# Altium PCB Voltage transducers.PcbDoc
Units mm, origin at the board's own origin, x right, y up, seen from the top; angles counter-clockwise.
Board outline 170 x 100 mm, 2 copper layers (Top Layer, Bottom Layer); 65 components, 30 nets, 157 pads, 0 vias.
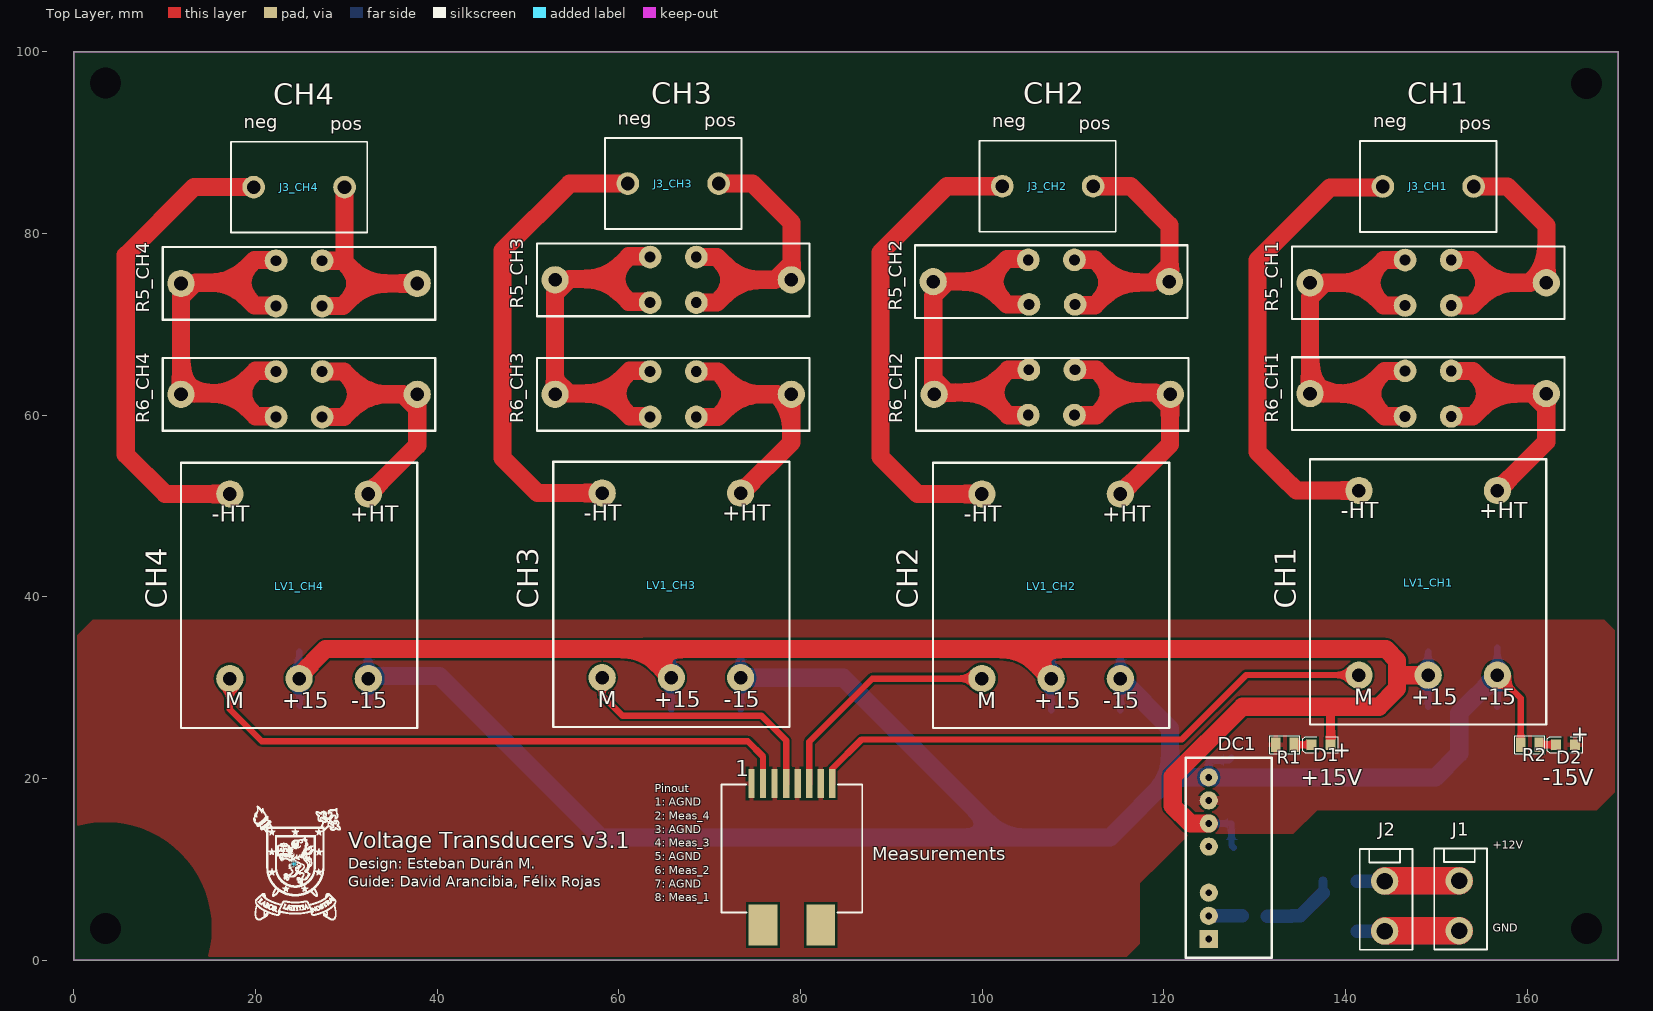
[diagram p0: Top Layer view]
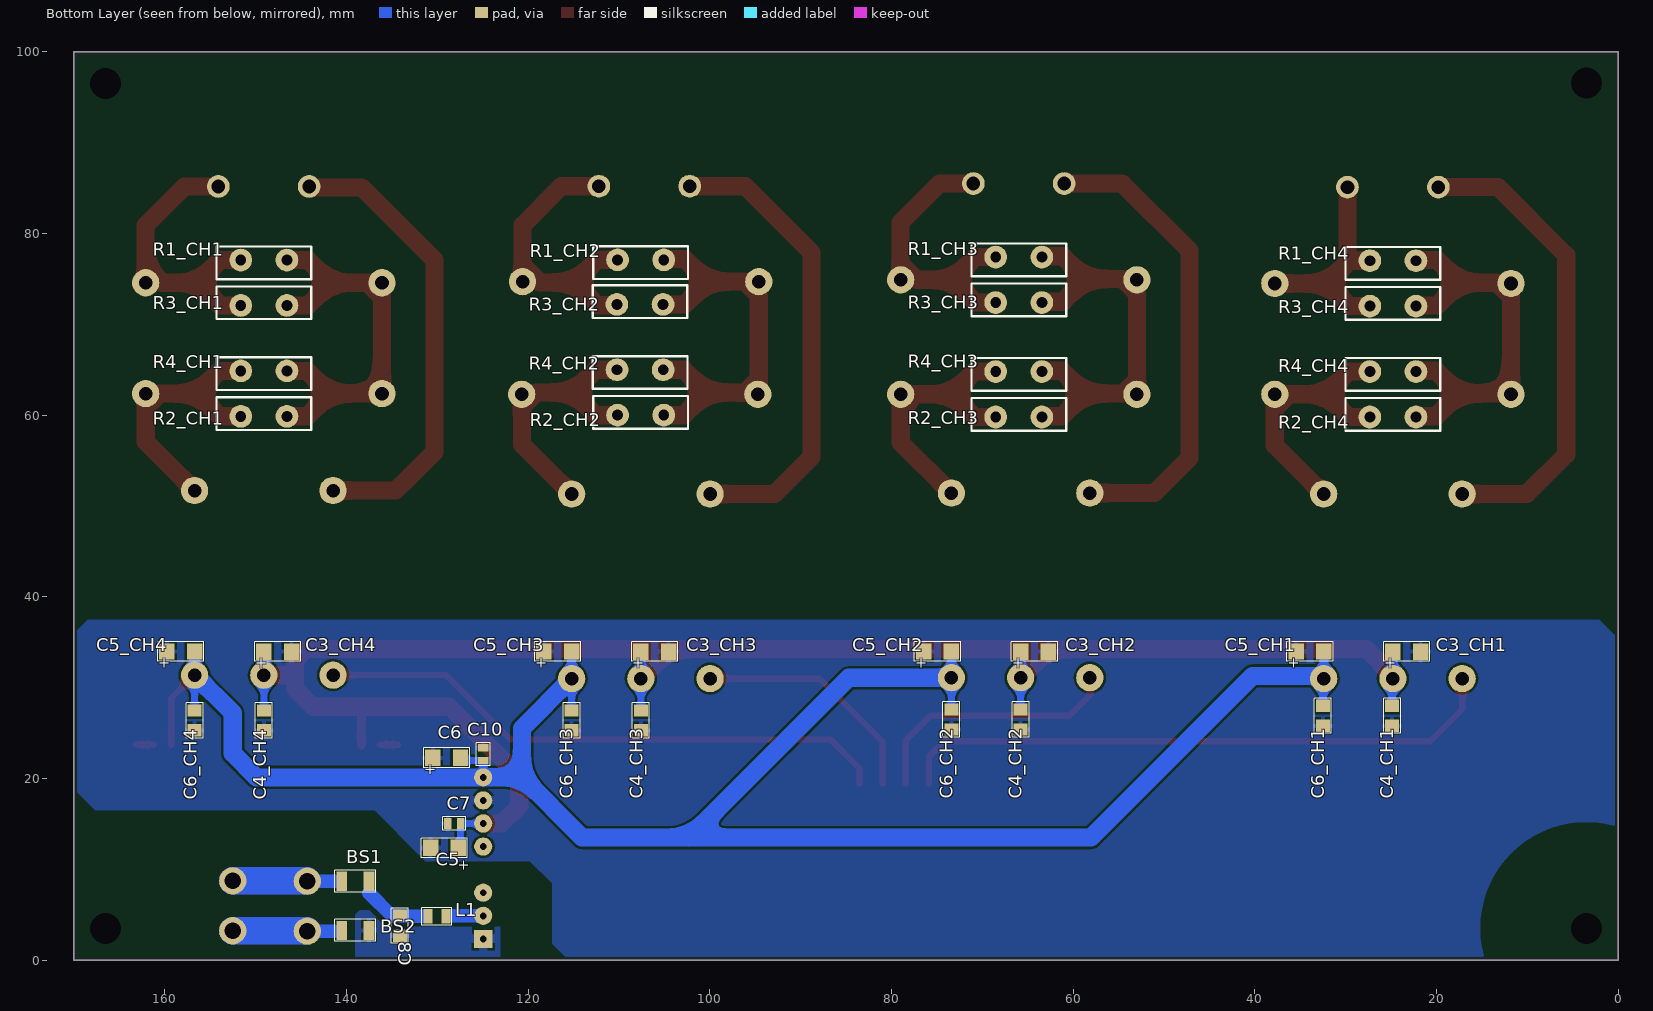
[diagram p1: Bottom Layer view, seen from below]
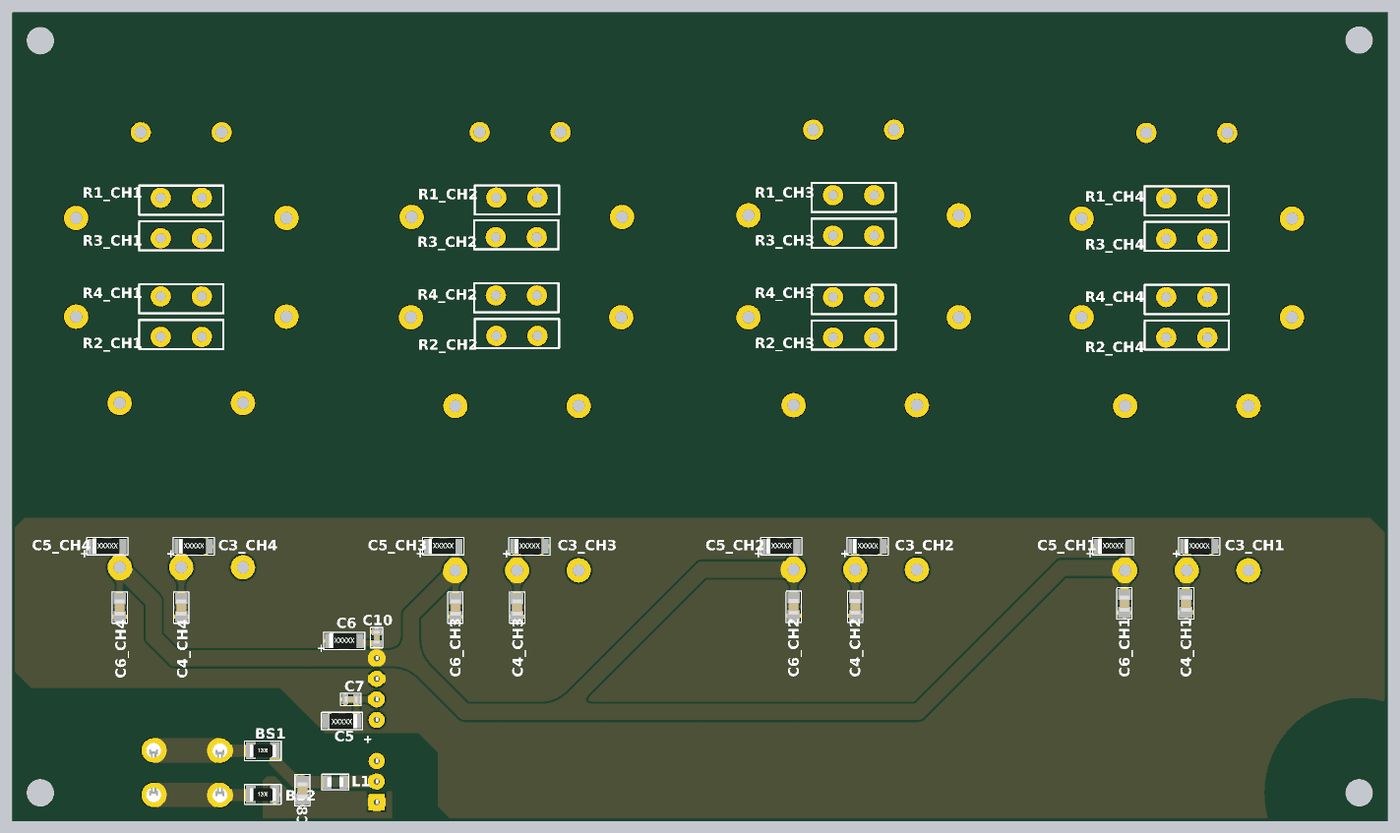
[diagram p2: 3D render of the assembled board from below, using the file's embedded part models]

## Layer stack, top to bottom
Top Solder: solder mask 0.0102, Solder Resist, Dk 3.5
Top Layer: signal copper 0.0356
Dielectric1: dielectric 0.32, FR-4, Dk 4.8
Bottom Layer: signal copper 0.0356
Bottom Solder: solder mask 0.0102, Solder Resist, Dk 3.5

## Board outline
0,0 0,100 170,100 170,0

## Design rules (kind name [scope] priority, off if disabled: settings)
Clearance 1.5kV [InNamedPolygon('GND_filtered') OR InNamedPolygon('AGND') vs InNamedUnion('Mechanical_Pads')] p1: gap=0.254 except(10: THPad-Poly)
Clearance [All] p2: gap=0.254
ComponentClearance [All] p1: gap=0.254 collisioncheckmode=3 verticalgap=0 showdistances=FALSE
Height [All] p1: minheight=0 maxheight=50 prefheight=12.7
HoleSize [All] p1: absolutevalues=TRUE maxlimit=100 minlimit=0.025 maxpercent=80.000 minpercent=20.000
MinimumSolderMaskSliver [All] p1: minsoldermaskwidth=0.154
PlaneConnect [All] p1: planeconnectstyle=Relief reliefexpansion=0.508 reliefentries=4 reliefconductorwidth=0.254 reliefairgap=0.7
PolygonConnect PolygonConnect_1 [All vs HasFootprint('DC/DC +-15V 6W')] p1: connectstyle=Relief reliefconductorwidth=1 reliefentries=4 polygonreliefangle="90 Angle" airgapwidth=0.254
PolygonConnect [All] p2: connectstyle=Relief reliefconductorwidth=0.5 reliefentries=4 polygonreliefangle="90 Angle" airgapwidth=0.254
RoutingVias [All] p1: holewidth=0.711 width=1.27 viastyle="Through Hole" minholewidth=0.711 minwidth=1.27 maxholewidth=0.711 maxwidth=1.27
SilkToSilkClearance [All] p1: silktosilkclearance=0
SilkToSolderMaskClearance SilkscreenOverComponentPads [IsPad] p1: minsilkscreentomaskgap=0 clearancetoexposedcopper=TRUE
SolderMaskExpansion [All] p1: expansion=0.102
Width [All] p1: maxlimit=3 minlimit=0.254 preferedwidth=1.5
23 further rules are at their usual default settings.

## Classes and differential pairs
component class Voltage_Board: * C5 C6 Measurements
channel class Transducer: CH1 CH2 CH3 CH4
net class MEDICION[1..4]: MEDICION1 MEDICION2 MEDICION3 MEDICION4
component class PowerSupply: BS1 BS2 C7 C8 C10 D1 D2 DC1 J1 J2 L1 R1 R2 R?
component class CH4: C3_CH4 C4_CH4 C5_CH4 C6_CH4 J3_CH4 LV1_CH4 R1_CH4 R2_CH4 R3_CH4 R4_CH4 R5_CH4 R6_CH4
component class CH3: C3_CH3 C4_CH3 C5_CH3 C6_CH3 J3_CH3 LV1_CH3 R1_CH3 R2_CH3 R3_CH3 R4_CH3 R5_CH3 R6_CH3
component class CH2: C3_CH2 C4_CH2 C5_CH2 C6_CH2 J3_CH2 LV1_CH2 R1_CH2 R2_CH2 R3_CH2 R4_CH2 R5_CH2 R6_CH2
component class CH1: C3_CH1 C4_CH1 C5_CH1 C6_CH1 J3_CH1 LV1_CH1 R1_CH1 R2_CH1 R3_CH1 R4_CH1 R5_CH1 R6_CH1

## Components (designator, comment, footprint, x,y, rotation, side; value= is the part's Value field where it differs from the comment)
* "LOGO USACH" "Logo Usach" 24.3,10.4 r0 top
BS1 "Ferrite bead" RES_1206 140.5,8.7 r270 bottom
BS2 "Ferrite bead" RES_1206 140.5,3.3 r270 bottom
C3_CH1 "1uF" "CAP_1206 Tantalio" 23.275,33.975 r90 bottom (schematic designator C3)
C3_CH2 "1uF" "CAP_1206 Tantalio" 64.255,33.975 r90 bottom (schematic designator C3)
C3_CH3 "1uF" "CAP_1206 Tantalio" 106.055,33.975 r90 bottom (schematic designator C3)
C3_CH4 "1uF" "CAP_1206 Tantalio" 147.555,33.975 r90 bottom (schematic designator C3)
C4_CH1 "100nF" CAP_0805 24.886,28.006 r180 bottom (schematic designator C4)
C4_CH2 "100nF" CAP_0805 65.78,27.606 r180 bottom (schematic designator C4)
C4_CH3 "100nF" CAP_0805 107.58,27.506 r180 bottom (schematic designator C4)
C4_CH4 "100nF" CAP_0805 149.08,27.506 r180 bottom (schematic designator C4)
C5 "10uF" "CAP_1206 Tantalio" 129.205,12.386 r270 bottom
C5_CH1 "1uF" "CAP_1206 Tantalio" 33.931,33.985 r90 bottom (schematic designator C5)
C5_CH2 "1uF" "CAP_1206 Tantalio" 74.925,33.985 r90 bottom (schematic designator C5)
C5_CH3 "1uF" "CAP_1206 Tantalio" 116.725,33.985 r90 bottom (schematic designator C5)
C5_CH4 "1uF" "CAP_1206 Tantalio" 158.225,33.985 r90 bottom (schematic designator C5)
C6 "10uF" "CAP_1206 Tantalio" 128.955,22.286 r90 bottom
C6_CH1 "100nF" CAP_0805 32.506,25.806 r0 bottom (schematic designator C6)
C6_CH2 "100nF" CAP_0805 73.4,25.406 r0 bottom (schematic designator C6)
C6_CH3 "100nF" CAP_0805 115.2,25.306 r0 bottom (schematic designator C6)
C6_CH4 "100nF" CAP_0805 156.7,25.306 r0 bottom (schematic designator C6)
C7 "0.33uF" CAP_0603 127.43,15.056 r270 bottom
C8 "10uF" CAP_0805 134.1,4.9 r180 bottom
C10 "0.33uF" CAP_0603 124.93,23.386 r180 bottom
D1 "LED" LED_0805_GREEN 137.302,23.725 r180 top
D2 "LED" LED_0805_GREEN 164.217,23.725 r180 top
DC1 "MEAN WELL USA" "DC/DC +-15V 6W" 124.93,2.356 r90 top
J1 "Conector tipo ATX 2pos_1" "Conector tipo ATX Wurth 2 posiciones - (5.5mm)" 152.5,6 r180 top
J2 "Conector tipo ATX 2pos_1" "Conector tipo ATX Wurth 2 posiciones - (5.5mm)" 144.294,5.96 r180 top
J3_CH1 "CH1" CON_282858-2 154.094,85.176 r180 top (schematic designator J3)
J3_CH2 "CH2" CON_282858-2 112.2,85.2 r180 top (schematic designator J3)
J3_CH3 "CH3" CON_282858-2 70.98,85.5 r180 top (schematic designator J3)
J3_CH4 "CH4" CON_282858-2 29.8,85.1 r180 top (schematic designator J3)
L1 "10uH" INDUCTOR_0805 131.7,5.8 r90 bottom
LV1_CH1 "LV" "LEM_LV 25-P" 141.46,31.382 r0 top (schematic designator LV1)
LV1_CH2 "LV" "LEM_LV 25-P" 99.96,31.006 r0 top (schematic designator LV1)
LV1_CH3 "LV" "LEM_LV 25-P" 58.16,31.106 r0 top (schematic designator LV1)
LV1_CH4 "LV" "LEM_LV 25-P" 17.18,31.006 r0 top (schematic designator LV1)
Measurements "RJ-45 Modulo" "RJ45 1 Modulo SMD" 74.596,19.45 r0 top
R1 "5.6K" RES_0805 132.302,23.725 r90 top
R1_CH1 "RES" RES_MP925-15.0K-1% 151.62,77.076 r180 bottom (schematic designator R1)
R1_CH2 "RES" RES_MP925-15.0K-1% 110.14,77.1 r180 bottom (schematic designator R1)
R1_CH3 "RES" RES_MP925-15.0K-1% 68.52,77.4 r180 bottom (schematic designator R1)
R1_CH4 "RES" RES_MP925-15.0K-1% 27.34,77 r180 bottom (schematic designator R1)
R2 "5.6K" RES_0805 161.27,23.725 r270 top
R2_CH1 "RES" RES_MP925-15.0K-1% 146.54,59.876 r0 bottom (schematic designator R2)
R2_CH2 "RES" RES_MP925-15.0K-1% 105.06,60 r0 bottom (schematic designator R2)
R2_CH3 "RES" RES_MP925-15.0K-1% 63.44,59.8 r0 bottom (schematic designator R2)
R2_CH4 "RES" RES_MP925-15.0K-1% 22.26,59.8 r0 bottom (schematic designator R2)
R3_CH1 "RES" RES_MP925-15.0K-1% 146.54,72.076 r0 bottom (schematic designator R3)
R3_CH2 "RES" RES_MP925-15.0K-1% 105.14,72.2 r0 bottom (schematic designator R3)
R3_CH3 "RES" RES_MP925-15.0K-1% 63.44,72.4 r0 bottom (schematic designator R3)
R3_CH4 "RES" RES_MP925-15.0K-1% 22.26,72 r0 bottom (schematic designator R3)
R4_CH1 "RES" RES_MP925-15.0K-1% 151.62,64.876 r180 bottom (schematic designator R4)
R4_CH2 "RES" RES_MP925-15.0K-1% 110.2,65 r180 bottom (schematic designator R4)
R4_CH3 "RES" RES_MP925-15.0K-1% 68.52,64.8 r180 bottom (schematic designator R4)
R4_CH4 "RES" RES_MP925-15.0K-1% 27.34,64.8 r180 bottom (schematic designator R4)
R5_CH1 "RES" RES_RS00515K00FE73 136.08,74.576 r0 top (schematic designator R5)
R5_CH2 "RES" RES_RS00515K00FE73 94.6,74.7 r0 top (schematic designator R5)
R5_CH3 "RES" RES_RS00515K00FE73 52.98,74.9 r0 top (schematic designator R5)
R5_CH4 "RES" RES_RS00515K00FE73 11.8,74.5 r0 top (schematic designator R5)
R6_CH1 "RES" RES_RS00515K00FE73 162.08,62.376 r180 top (schematic designator R6)
R6_CH2 "RES" RES_RS00515K00FE73 120.7,62.3 r180 top (schematic designator R6)
R6_CH3 "RES" RES_RS00515K00FE73 78.98,62.3 r180 top (schematic designator R6)
R6_CH4 "RES" RES_RS00515K00FE73 37.8,62.3 r180 top (schematic designator R6)

## Footprints (in the part's own frame and the unit in brackets; to place one, negate y for a bottom-side part, rotate by r counter-clockwise, add the part's x,y. Pads: shape width x height; smd on the part's side, far side on the other; paste and mask are expansions set on the pad)
CAP_0603 [mm] "CAP CER 0603"
  rect 1.2x0.8 smd: 1(0,0) 2(0,-1.4)
  silkscreen extent -0.76,-1.96 0.76,0.56, body extent -0.39,-1.45 0.41,0.15, height 0.4
CAP_0805 [mm] "CAP CER 0805"
  rect 1.55x1.35 smd: 1(0,0) 2(0,-2.2)
  silkscreen extent -0.94,-3.04 0.94,0.84, body extent -0.62,-2.1 0.63,-0.1, height 0.6
"CAP_1206 Tantalio" [mm] "Case A"
  rect 1.8x1.7 smd: 1(0,1.525) 2(0,-1.525)
  silkscreen extent -1.07,-2.55 1.08,2.54, body extent -0.95,-1.53 0.95,1.88, height 1.84
CON_282858-2 [mm] "TERM BLOCK 2POS SIDE ENTRY 10MM"
  round 2.5 hole 1.5: 1(0,0) 2(10,0)
  silkscreen extent -2.5,-5 12.5,5, body extent -2.4,-4.9 12.4,4.91, height 19
"Conector tipo ATX Wurth 2 posiciones - (5.5mm)" [mm] "Vertical Pitch 5.5 mm (64900221122)"
  round 3 hole 1.8: 1(0,2.75) 2(0,-2.75)
  silkscreen extent -3.05,-6.3 2.75,4.8, body extent -3.05,-6.3 2.75,4.8, height 12.9
"DC/DC +-15V 6W" [mm] "Marca MEAN WELL (DPBW06F-15)"
  rect 2x2 hole 0.762: 1(0,0)
  round 2 hole 0.762: 2(2.54,0) 3(5.08,0) 6(12.7,0) 7(15.24,0) 8(17.78,0) ""(10.16,0)
  silkscreen extent -2.07,-6.95 19.93,2.55, body extent -2.07,-6.95 19.93,2.55, height 12.3
INDUCTOR_0805 [mm] "Wurth"
  rect 1.6x1 smd: 1(-0.97,-0.67) 2(-0.97,-2.67)
  silkscreen extent -1.94,-3.33 0,0, body extent -1.57,-2.67 -0.37,-0.67, height 1
LED_0805_GREEN [mm] "Chip LED, 2-Leads, Body 2.0x1.3mm, IPC Medium Density"
  rect 1.1x1.2 smd: 1(-1.05,0) 2(1.05,0)
  silkscreen extent -1.91,-0.89 2.03,0.89, body extent -1,-0.63 1,0.62, height 0.68
"LEM_LV 25-P" [mm] "TRANSDUCR VOLTAG CLOSE LOOP 10MA"
  round 3 hole 1.5: 1(0,0) 2(7.62,0) 3(15.24,0) 4(15.24,20.32) 5(0,20.32)
  silkscreen extent -5.38,-5.44 20.62,23.76, body extent -5.51,-5.44 20.75,23.76, height 16.4
"Logo Usach" [mm] "9.5 x 12.6 mm"
  silkscreen extent -4.53,-5.94 5.09,6.59
RES_0805 [mm] "RES 0805"
  rect 1.6x1 smd: 1(0,0) 2(0,-2)
  silkscreen extent -0.97,-2.66 0.97,0.67, body extent -0.61,-2 0.64,0, height 0.5
RES_1206 [mm] "RES 1206"
  rect 2.1x1.2 smd: 1(0,0) 2(0,3)
  silkscreen extent -1.22,-0.76 1.22,3.76, body extent -0.78,-0.1 0.82,3.1, height 0.6
RES_MP925-15.0K-1% [mm] "RES 15K OHM 25W 1% TO220"
  round 2.5 hole 1.2: 1(0,0) 2(5.08,0)
  silkscreen extent -2.67,-2.1 7.75,1.5, body extent -2.67,-1.89 7.75,1.29, height 19.6
RES_RS00515K00FE73 [mm] "RES 15K OHM 5W 1% WW AXIAL"
  round 3 hole 1.5: 1(0,0) 2(26,0)
  silkscreen extent -2,-4 28,4, body extent 0,-3.9 26,4.08, height 7.97
"RJ45 1 Modulo SMD" [mm] "smd WURTH"
  rect 0.7x3.2 smd: 1(0,0) 2(1.27,0) 3(2.54,0) 4(3.81,0) 5(5.08,0) 6(6.35,0) 7(7.62,0) 8(8.89,0)
  rect 3.15x4.5 smd: ""(1.27,-15.55) ""(7.62,-15.55)
  silkscreen extent -3.31,-14.2 12.2,-0.1, body extent -3.32,-16.64 12.23,1.36, height 12.7

## Part data
BS1 BS2: library part Bead, "4A"
C3_CH1 C3_CH2 C3_CH3 C3_CH4 C5 C5_CH1 C5_CH2 C5_CH3 C5_CH4 C6: library part "Cap Tantalio 1206", "Capacitor Tantalio"
C4_CH1 C4_CH2 C4_CH3 C4_CH4 C6_CH1 C6_CH2 C6_CH3 C6_CH4: library part CAP_0805, "Capacitor"
C7 C10: library part Cap_0603, "Capacitor Ceramic"
C8: library part Cap_0805, "Capacitor"
D1 D2: library part LED2, "LED Magenta"
DC1: library part "DC/DC +12V a +-15V 6W", "Isolated Module DC DC Converter 2 Output 15V -15V 200mA, 200mA 9V - 36V Input"
J1 J2: "CONN HEADER VERT 2POS 5.5MM"
J3_CH1 J3_CH2 J3_CH3 J3_CH4: library part CON_282858-2, "282858-2"
L1: library part Inductor_0805, "500mA"
LV1_CH1 LV1_CH2 LV1_CH3 LV1_CH4: library part "LEM_LV 25-P", "LV 25-P"
Measurements: library part "RJ45 1 modulo SMD", "Modulo RJ-45 vertical SMD"
R1 R2: library part Res0805
R1_CH1 R1_CH2 R1_CH3 R1_CH4 R2_CH1 R2_CH2 R2_CH3 R2_CH4 R3_CH1 R3_CH2 R3_CH3 R3_CH4 R4_CH1 R4_CH2 R4_CH3 R4_CH4: library part RES_MP925-15.0K-1%, "MP925-15.0K-1%"
R5_CH1 R5_CH2 R5_CH3 R5_CH4 R6_CH1 R6_CH2 R6_CH3 R6_CH4: library part RES_RS00515K00FE73, "RS00515K00FE73"

## Free pads (board coordinates)
  round 3 hole 3.4 unplated: ""(3.5,3.5) ""(3.5,96.576) ""(166.5,3.5) ""(166.5,96.5)

## Nets (pads, with @x,y where several pads share a name; then routed paths per layer and width w, separated by ;. In a path a pad name is that pad's centre, name@x,y a point inside that pad or via, vN(x,y) a via of type N, cw(c..) or ccw(c..) an arc to the next point about the centre after c; other vN are vias at no path point)
+12V: BS1.1 J1.2 J2.2 | length 19.3
  Top Layer w3: J2.2@144.334,8.75 J1.2
  Bottom Layer w1.5: 141.29,8.71 J2.2
  Bottom Layer w3: J2.2@144.334,8.75 J1.2
+12V_FILTERED: BS1.2 C8.1 L1.1 | length 8.4
  Bottom Layer w1: 137.5,7.4 BS1.2
  Bottom Layer w1.5: L1.1@131.4,4.83 C8.1@134.03,4.83 ; C8.1 135,4.9 137.5,7.4
+15V: C3_CH1.1 C3_CH2.1 C3_CH3.1 C3_CH4.1 C4_CH1.1 C4_CH2.1 C4_CH3.1 C4_CH4.1 C5.1 C7.1 D1.1 DC1.6 LV1_CH1.2 LV1_CH2.2 LV1_CH3.2 LV1_CH4.2 | length 208.6
  Top Layer w1: D1.1 138.352,27.806
  Top Layer w2: LV1_CH4.2@24.786,31.306 27.73,34.25 62.636,34.25 ; LV1_CH3.2 62.636,34.25 ; LV1_CH2.2 104.336,34.25 ; DC1.6 122.91,15.056 120.96,17.006 120.96,20.206 128.66,27.906 143.66,27.906 145.66,29.906 145.66,31.306 ; LV1_CH1.2 145.736,31.382 145.66,31.306 ; 62.636,34.25 104.336,34.25 ; 104.336,34.25 144.416,34.25 145.66,33.006 145.66,31.306
  Bottom Layer w0.7: LV1_CH4.2@24.786,31.306 24.8,31.32 C3_CH1.1 ; C4_CH1.1 LV1_CH4.2@24.886,31.206 ; C4_CH2.1 LV1_CH3.2 ; LV1_CH3.2@65.78,31.32 C3_CH2.1 ; C4_CH3.1 LV1_CH2.2 ; LV1_CH2.2@107.58,31.32 C3_CH3.1 ; DC1.6 C7.1 127.43,12.636 C5.1 ; C4_CH4.1@149.08,27.906 LV1_CH1.2@149.08,31.406 ; LV1_CH1.2@149.08,31.32 C3_CH4.1
-15V: C5_CH1.2 C5_CH2.2 C5_CH3.2 C5_CH4.2 C6.2 C6_CH1.2 C6_CH2.2 C6_CH3.2 C6_CH4.2 C10.2 DC1.8 LV1_CH1.3 LV1_CH2.3 LV1_CH3.3 LV1_CH4.3 R2.2 | length 228.6
  Top Layer w0.7: LV1_CH1.3@156.7,31.406 159.27,28.836 R2.2
  Bottom Layer w0.7: LV1_CH4.3@32.406,31.33 C5_CH1.2 ; C6_CH1.2 LV1_CH4.3@32.506,31.206 ; C6_CH2.2 LV1_CH3.3 ; LV1_CH3.3@73.4,31.33 C5_CH2.2 ; C6_CH3.2 LV1_CH2.3 ; LV1_CH2.3@115.2,31.33 C5_CH3.2 ; DC1.8 C10.2 127.13,21.986 C6.2 ; C6_CH4.2@156.7,27.906 LV1_CH1.3@156.7,31.406 ; LV1_CH1.3@156.7,31.73 C5_CH4.2@156.7,34.385
  Bottom Layer w2: LV1_CH4.3@32.406,31.306 40.244,31.306 58.05,13.5 102.3,13.5 ; LV1_CH3.3 84.694,31.106 102.3,13.5 ; LV1_CH2.3 120.68,25.526 120.68,20.146 ; LV1_CH1.3@156.7,31.406 152.5,27.206 152.5,25.92 152.5,22.75 149.882,20.132 146.712,20.132 124.93,20.132 DC1.8 124.92,20.146 120.68,20.146 ; 102.3,13.5 114.034,13.5 120.68,20.146
AGND: C3_CH1.2 C3_CH2.2 C3_CH3.2 C3_CH4.2 C4_CH1.2 C4_CH2.2 C4_CH3.2 C4_CH4.2 C5.2 C5_CH1.1 C5_CH2.1 C5_CH3.1 C5_CH4.1 C6.1 C6_CH1.1 C6_CH2.1 C6_CH3.1 C6_CH4.1 C7.2 C10.1 D2.1 DC1.7 Measurements.1 Measurements.3 Measurements.5 Measurements.7 R1.1
GND: BS2.1 J1.1 J2.1 | length 19.4
  Top Layer w3: J2.1 144.334,3.25 J1.1
  Bottom Layer w1.5: 141.27,3.21 J2.1
  Bottom Layer w3: J2.1@144.334,3.25 J1.1
GND_FILTERED: BS2.2 C8.2 DC1.1
MEDICION1: LV1_CH1.1 Measurements.8 | length 63.9
  Top Layer w0.7: Measurements.8 83.486,21.086 86.7,24.3 121.954,24.3 129.06,31.406 LV1_CH1.1@141.46,31.406
MEDICION2: LV1_CH2.1 Measurements.6 | length 26.5
  Top Layer w0.7: Measurements.6 80.946,24.046 87.906,31.006 LV1_CH2.1
MEDICION3: LV1_CH3.1 Measurements.4 | length 29
  Top Layer w0.7: LV1_CH3.1 58.16,29.14 60.4,26.9 75.7,26.9 78.406,24.194 Measurements.4
MEDICION4: LV1_CH4.1 Measurements.2 | length 67.5
  Top Layer w0.7: LV1_CH4.1@17.166,31.306 17.166,27.634 20.7,24.1 74.2,24.1 75.866,22.434 Measurements.2
NetD1_2: D1.2 R1.2 | length 2
  Top Layer w0.7: R1.2 D1.2@136.302,23.725
NetD2_2: D2.2 R2.1 | length 1.9
  Top Layer w0.7: R2.1@161.217,23.725 D2.2
NetDC1_2: DC1.2 L1.2 | length 3.7
  Bottom Layer w1.5: DC1.2 L1.2@128.6,4.896
NetJ3_CH1_1: J3_CH1.1 R1_CH1.1 R3_CH1.2 R5_CH1.2 | length 34.1
  Top Layer w2: R3_CH1.2 153.894,72.076 156.394,74.576 ; R1_CH1.1 153.894,77.076 156.394,74.576 ; J3_CH1.1 157.794,85.176 162.094,80.876 R5_CH1.2@162.094,74.576 ; 162.094,76.376 160.294,74.576 156.394,74.576
NetJ3_CH1_2: J3_CH1.2 LV1_CH1.5 | length 51.2
  Top Layer w2: LV1_CH1.5 134.574,51.702 133,53.276 132.973,53.276 130.294,55.955 130.294,77.076 138.294,85.076 J3_CH1.2@144.094,85.076
NetJ3_CH2_1: J3_CH2.1 R1_CH2.1 R3_CH2.2 R5_CH2.2 | length 34.2
  Top Layer w2: R3_CH2.2@110.14,72.1 112.414,72.1 114.914,74.6 ; R1_CH2.1 112.414,77.1 114.914,74.6 ; J3_CH2.1@112.614,85.2 116.314,85.2 120.614,80.9 R5_CH2.2@120.614,74.6 ; 120.614,76.514 118.7,74.6 114.914,74.6
NetJ3_CH2_2: J3_CH2.2 LV1_CH2.5 | length 51.8
  Top Layer w2: LV1_CH2.5 92.853,51.326 88.8,55.379 88.8,77.9 96.1,85.2 J3_CH2.2
NetJ3_CH3_1: J3_CH3.1 R1_CH3.1 R3_CH3.2 R5_CH3.2 | length 35.9
  Top Layer w2: R3_CH3.2 70.794,72.4 73.294,74.9 ; R1_CH3.1 70.794,77.4 73.294,74.9 ; J3_CH3.1@70.994,85.5 74.694,85.5 78.994,81.2 78.994,74.9 78.994,76.7 77.194,74.9 73.294,74.9
NetJ3_CH3_2: J3_CH3.2 LV1_CH3.5 | length 52.2
  Top Layer w2: LV1_CH3.5 51.053,51.426 47.2,55.279 47.2,78.1 54.6,85.5 J3_CH3.2
NetJ3_CH4_1: J3_CH4.1 R1_CH4.1 R3_CH4.2 R5_CH4.2 | length 25.5
  Top Layer w2: R3_CH4.2 29.614,72 32.114,74.5 ; R1_CH4.1 29.614,77 ; J3_CH4.1 29.8,77.186 29.614,77 ; R5_CH4.2 32.114,74.5 ; 29.614,77 32.114,74.5
NetJ3_CH4_2: J3_CH4.2 LV1_CH4.5 | length 52.4
  Top Layer w2: LV1_CH4.5 10.073,51.326 5.72,55.679 5.72,77.6 13.22,85.1 J3_CH4.2
NetLV1_CH1_4: LV1_CH1.4 R2_CH1.2 R4_CH1.1 R6_CH1.1 | length 30.4
  Top Layer w2: R2_CH1.2 153.994,59.876 156.494,62.376 ; R4_CH1.1 153.994,64.876 156.494,62.376 ; LV1_CH1.4 162.08,57.082 R6_CH1.1@162.08,61.79 ; 162.08,60.79 160.494,62.376 156.494,62.376
NetLV1_CH2_4: LV1_CH2.4 R2_CH2.2 R4_CH2.1 R6_CH2.1 | length 31
  Top Layer w2: R2_CH2.2@110.2,60 112.574,60 115.074,62.5 ; R4_CH2.1 112.574,65 115.074,62.5 ; LV1_CH2.4@115.326,51.326 LV1_CH2.4 120.66,56.786 R6_CH2.1@120.66,60.914 ; R6_CH2.1@120.66,61.914 R6_CH2.1@120.66,60.914 ; 115.074,62.5 119.074,62.5 R6_CH2.1@120.66,60.914
NetLV1_CH3_4: LV1_CH3.4 R2_CH3.2 R4_CH3.1 R6_CH3.1 | length 31.8
  Top Layer w2: R2_CH3.2 70.894,59.8 73.394,62.3 ; R4_CH3.1 70.894,64.8 73.394,62.3 ; LV1_CH3.4@73.363,51.463 73.026,51.126 LV1_CH3.4@73.646,51.126 ; LV1_CH3.4 78.98,57.006 78.98,60.714 ; R6_CH3.1@78.98,61.714 78.98,60.714 ; 73.394,62.3 77.394,62.3 78.98,60.714
NetLV1_CH4_4: LV1_CH4.4 R2_CH4.2 R4_CH4.1 R6_CH4.1 | length 31
  Top Layer w2: R2_CH4.2 29.714,59.8 32.214,62.3 ; R4_CH4.1 29.714,64.8 32.214,62.3 ; LV1_CH4.4@32.22,51.426 LV1_CH4.4@32.546,51.426 ; LV1_CH4.4 32.446,51.326 LV1_CH4.4@32.546,51.426 ; R6_CH4.1@37.8,61.714 37.8,60.714 ; 32.214,62.3 36.214,62.3 37.8,60.714 ; LV1_CH4.4@32.546,51.426 37.8,56.68 37.8,60.714
NetR1_CH1_2: R1_CH1.2 R2_CH1.1 R3_CH1.1 R4_CH1.2 R5_CH1.1 R6_CH1.2 | length 49.7
  Top Layer w2: R6_CH1.2@136.08,62.29 136.08,72.976 137.68,74.576 141.694,74.576 ; R2_CH1.1 144.294,59.876 141.794,62.376 ; R4_CH1.2 144.294,64.876 141.794,62.376 ; R3_CH1.1 144.194,72.076 141.694,74.576 ; R1_CH1.2 144.194,77.076 141.694,74.576 ; 137.594,62.376 R6_CH1.2 136.08,63.89 137.594,62.376 ; 137.594,62.376 141.794,62.376
NetR1_CH2_2: R1_CH2.2 R2_CH2.1 R3_CH2.1 R4_CH2.2 R5_CH2.1 R6_CH2.2 | length 48.2
  Top Layer w2: R6_CH2.2@94.6,62.414 94.6,73.1 96.2,74.7 100.214,74.7 ; R6_CH2.2@94.6,62.5 R6_CH2.2@96.114,62.5 ; 94.6,64.014 R6_CH2.2@96.114,62.5 ; R2_CH2.1 102.814,60 100.314,62.5 ; R3_CH2.1@105.06,72.2 102.714,72.2 100.214,74.7 ; R1_CH2.2@105.06,77.2 102.714,77.2 100.214,74.7 ; R4_CH2.2 102.814,65 100.314,62.5 ; R6_CH2.2@96.114,62.5 100.314,62.5
NetR1_CH3_2: R1_CH3.2 R2_CH3.1 R3_CH3.1 R4_CH3.2 R5_CH3.1 R6_CH3.2 | length 48.5
  Top Layer w2: 52.98,63.9 54.494,62.386 ; R2_CH3.1@63.44,59.886 61.194,59.886 58.694,62.386 ; R4_CH3.2@63.44,64.886 61.194,64.886 58.694,62.386 ; R3_CH3.1@63.44,72.486 61.094,72.486 58.594,74.986 ; R1_CH3.2@63.44,77.486 61.094,77.486 58.594,74.986 ; 54.494,62.386 52.98,62.386 52.98,73.386 54.58,74.986 58.594,74.986 ; 54.494,62.386 58.694,62.386
NetR1_CH4_2: R1_CH4.2 R2_CH4.1 R3_CH4.1 R4_CH4.2 R5_CH4.1 R6_CH4.2 | length 49.7
  Top Layer w2: R6_CH4.2 11.8,72.986 13.4,74.586 17.414,74.586 ; R2_CH4.1@22.26,59.886 20.014,59.886 17.514,62.386 ; R4_CH4.2@22.26,64.886 20.014,64.886 17.514,62.386 ; R3_CH4.1@22.26,72.086 19.914,72.086 17.414,74.586 ; R1_CH4.2@22.26,77.086 19.914,77.086 17.414,74.586 ; 13.314,62.386 11.8,62.386 11.8,63.9 13.314,62.386 ; 13.314,62.386 17.514,62.386
pads on no net: DC1. DC1.3 Measurements.

## Polygon pours and split planes (outlines as drawn)
GND_FILTERED on Bottom Layer "GND_filtered" (solid, pour order 14): 137.5,5.5 135.7,3.7 123.05,3.7 123.05,0.25 123.3,0 139,0 139,5 138.5,5.5
AGND on Bottom Layer "AGND" (solid, remove dead copper, pour order 8): 169.639,36.311 168.45,37.5 2.1,37.5 0,35.4 0,0 115.544,0 117.361,1.817 117.361,8.456 119.792,10.886 131.286,10.886 136.894,16.494 144.394,16.494 167.644,16.494 169.639,18.489
AGND on Top Layer "AGND" (solid, remove dead copper, pour order 16): 170,35.95 168.45,37.5 2.1,37.5 0,35.4 0,0 115.544,0 117.361,1.817 117.361,8.456 119.792,10.886 122.805,13.9 134.254,13.9 136.848,16.494 167.644,16.494 170,18.85

## Keep-outs
Keep-Out Layer:
  the board outline again, w0.2

## Silkscreen, mask and mechanical layers (free items; w line width, h text height)
Top Overlay:
  text "neg" at 59.9,91.5 h2.5
  text "pos" at 69.4,91.25 h2.5
  text "neg" at 101.12,91.2 h2.5
  text "neg" at 143.014,91.176 h2.5
  text "neg" at 18.72,91.1 h2.5
  text "pos" at 110.62,90.95 h2.5
  text "pos" at 152.514,90.926 h2.5
  text "pos" at 28.22,90.85 h2.5
  text "CH4" at 10.98,38.7 h4 r90
  text "CH3" at 51.88,38.7 h4 r90
  text "CH2" at 93.68,38.7 h4 r90
  text "CH1" at 135.28,38.7 h4 r90
  text "+15V" at 135.06,18.656 h3
  text "-15V" at 161.71,18.656 h3
  text "Voltage Transducers v3.1" at 30.2,11.7 h3
  text "Design: Esteban Durán M." at 30.2,9.7 h2
  text "Guide: David Arancibia, Félix Rojas" at 30.2,7.7 h2
  text "Pinout / 1: AGND / 2: Meas_4 / 3: AGND / 4: Meas_3 / 5: AGND / 6: Meas_2 / 7: AGND / 8: Meas_1" at 63.96,6.156 h1.5
  text "+12V /  /  /  /  /  / GND" at 156.2,2.8 h1.52

## Dimensions
170,100 to 170,0 on Mechanical 1
0,100 to 170,100 on Mechanical 1

## Text inside footprints (layer, text, board x,y; h text height)
C3_CH1: Bottom Overlay "+" at 24.195,32.015 h2 r270
C3_CH2: Bottom Overlay "+" at 65.175,32.015 h2 r270
C3_CH3: Bottom Overlay "+" at 106.975,32.015 h2 r270
C3_CH4: Bottom Overlay "+" at 148.475,32.015 h2 r270
C5: Bottom Overlay "+" at 127.93,11.136 h2 r90
C5_CH1: Bottom Overlay "+" at 34.851,32.025 h2 r270
C5_CH2: Bottom Overlay "+" at 75.845,32.025 h2 r270
C5_CH3: Bottom Overlay "+" at 117.645,32.025 h2 r270
C5_CH4: Bottom Overlay "+" at 159.145,32.025 h2 r270
C6: Bottom Overlay "+" at 129.875,20.326 h2 r270
D1: Top Overlay "+" at 140.602,24.465 h3 r180
D2: Top Overlay "+" at 166.817,26.225 h3 r180
LV1_CH1: Top Overlay "-HT" at 139.461,48.042 h3; Top Overlay "+HT" at 154.701,48.042 h3; Top Overlay "M" at 140.96,27.512 h3; Top Overlay "-15" at 154.826,27.512 h3; Top Overlay "+15" at 147.206,27.512 h3
LV1_CH2: Top Overlay "-HT" at 97.961,47.666 h3; Top Overlay "+HT" at 113.201,47.666 h3; Top Overlay "M" at 99.46,27.136 h3; Top Overlay "-15" at 113.326,27.136 h3; Top Overlay "+15" at 105.706,27.136 h3
LV1_CH3: Top Overlay "-HT" at 56.161,47.766 h3; Top Overlay "+HT" at 71.401,47.766 h3; Top Overlay "M" at 57.66,27.236 h3; Top Overlay "-15" at 71.526,27.236 h3; Top Overlay "+15" at 63.906,27.236 h3
LV1_CH4: Top Overlay "-HT" at 15.181,47.666 h3; Top Overlay "+HT" at 30.421,47.666 h3; Top Overlay "M" at 16.68,27.136 h3; Top Overlay "-15" at 30.546,27.136 h3; Top Overlay "+15" at 22.926,27.136 h3
Measurements: Top Overlay "1" at 72.796,19.65 h3